# Altium PCB PCB1.PcbDoc
Units mil, origin at the board's own origin, x right, y up, seen from the top; angles counter-clockwise.
Board outline 1276.89 x 393.7 mil, 2 copper layers (Top Layer, Bottom Layer); 7 components, 9 nets, 47 pads, 10 vias.
Unrouted connection lines stored in the file: 1.
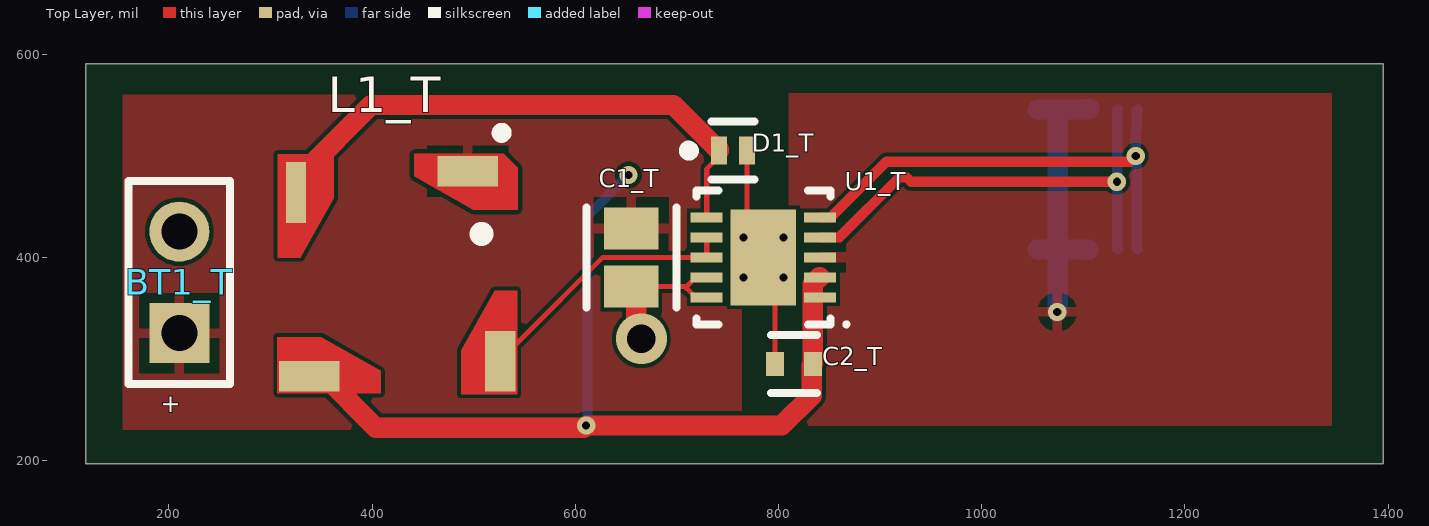
[diagram p0: Top Layer view]
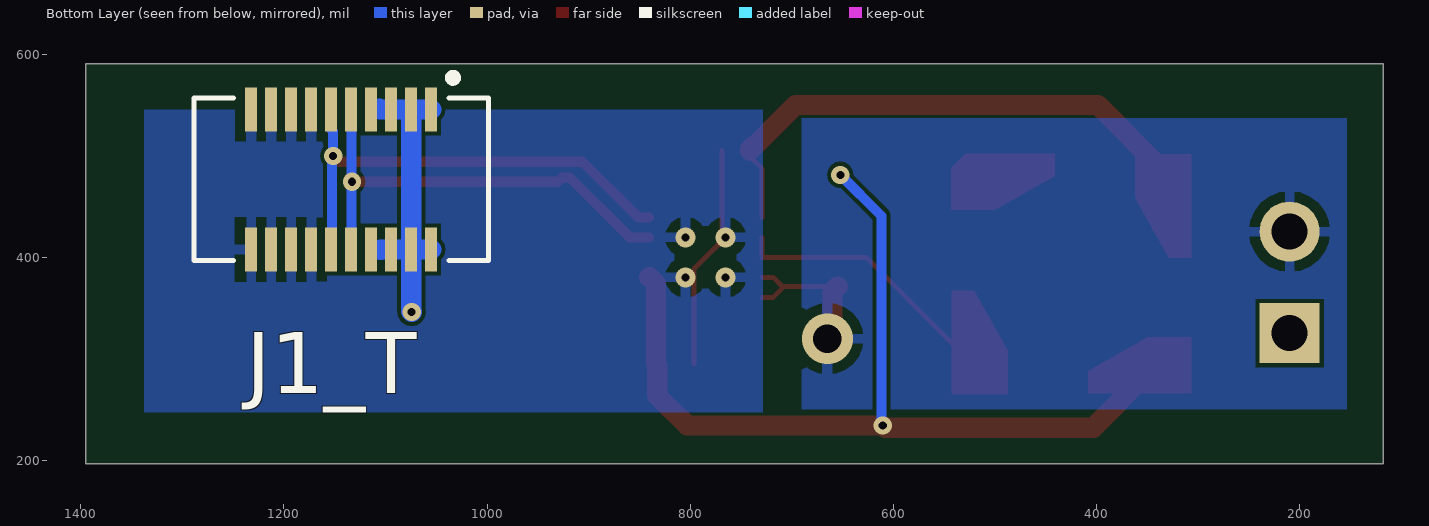
[diagram p1: Bottom Layer view, seen from below]
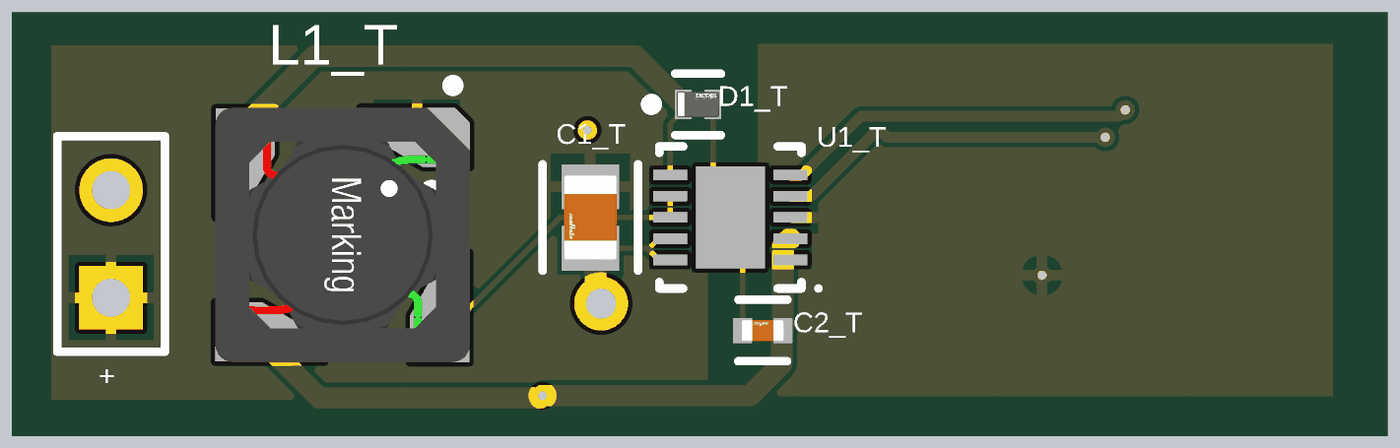
[diagram p2: 3D render of the assembled board from above, using the file's embedded part models]

## Layer stack, top to bottom
Top Solder: solder mask 0.4, Solder Resist, Dk 3.5
Top Layer: signal copper 1.4
Dielectric 1: dielectric 12.6, FR-4, Dk 4.8
Bottom Layer: signal copper 1.4
Bottom Solder: solder mask 0.4, Solder Resist, Dk 3.5

## Board outline
118.11,196.85 118.11,590.55 1395,590.55 1395,196.85

## Design rules (kind name [scope] priority, off if disabled: settings)
Clearance [All] p1: gap=4 ignorepadtopadclearanceinfootprint=FALSE
PolygonConnect [All] p1: connectstyle=Relief reliefconductorwidth=10 reliefentries=4 polygonreliefangle="90 Angle" airgapwidth=10
RoutingVias [All] p1: holewidth=8 width=18 viastyle="Through Hole" minholewidth=8 minwidth=18 maxholewidth=28 maxwidth=50
SolderMaskExpansion [All] p1: expansion=4 istentingtop=FALSE
Width [All] p1: maxlimit=50 minlimit=4 preferedwidth=10
30 further rules are at their usual default settings.

## Components (designator, comment, footprint, x,y, rotation, side; value= is the part's Value field where it differs from the comment)
BT1_T "Battery" BAT-2 210.13,375.38 r90 top
C1_T "GRM21BR60E107ME15L" FP-GRM21B-0_2-e0_2_0_7-IPC_C 655,400 r270 top
C2_T "GRM155R60J475ME87D" FP-GRM155-0_15-MFG 815,295 r180 top
D1_T "BAS70LP-7B" FP-X1-DFN1006-2-MFG 755,505 r0 top value=1pF
J1_T "53916-0208" "MOLEX-  539160208" 1143.66,466.77 r0 bottom
L1_T "74488540120" "WE-EHPI 5838" 425.08,383.78 r270 top
U1_T "MCRY12-125Q-42DIT" SON50P300X80_HS-11N 785,400 r180 top

## Footprints (in the part's own frame and the unit in brackets; to place one, negate y for a bottom-side part, rotate by r counter-clockwise, add the part's x,y. Pads: shape width x height; smd on the part's side, far side on the other; paste and mask are expansions set on the pad)
BAT-2 [mm] "Battery; 2 Leads"
  rect 1.5x1.5 hole 0.9: 1(-1.27,0)
  round 1.5 hole 0.9: 2(1.27,0)
  silkscreen extent -2.54,-1.27 2.54,1.27
FP-GRM21B-0_2-e0_2_0_7-IPC_C [mil]
  rect 41.52x53.39 smd paste+0 mask+0: 1(-28.57,0) 2(28.57,0)
  silkscreen extent -49,-44 49,44, body extent -53,-32 53,32, height 10
FP-GRM155-0_15-MFG [mm]
  rect 0.45x0.6 smd paste+0 mask+0: 1(-0.475,0) 2(0.475,0)
  silkscreen extent -0.58,-0.73 0.58,0.72, body extent -0.8,-0.43 0.8,0.43, height 0.25
FP-X1-DFN1006-2-MFG [mm]
  rect 0.4x0.7 smd paste+0 mask+0: 1(-0.35,0) 2(0.35,0)
  silkscreen extent -1.22,-0.72 0.54,0.72, body extent -0.65,-0.45 0.65,0.45, height 0.25
"MOLEX-  539160208" [mm]
  rect 0.3x1.1 smd: 1(-2.25,1.5) 2(-2.25,-2) 3(-1.75,1.5) 4(-1.75,-2) 5(-1.25,1.5) 6(-1.25,-2) 7(-0.75,1.5) 8(-0.75,-2) 9(-0.25,1.5) 10(-0.25,-2) 11(0.25,1.5) 12(0.25,-2) 13(0.75,1.5) 14(0.75,-2) 15(1.25,1.5) 16(1.25,-2) 17(1.75,1.5) 18(1.75,-2) 19(2.25,1.5) 20(2.25,-2)
  silkscreen extent -3.68,-2.89 3.68,1.78, body extent -3.65,-2.3 3.65,1.8, height 3.46
SON50P300X80_HS-11N [mm] "SON, 10-Leads, Body 3.00x3.00mm, Pitch 0.50mm, Thermal Pad 2.40x1.63mm, IPC Medium Density"
  rect 0.8x0.25 smd: 1(-1.415,1) 2(-1.415,0.5) 3(-1.415,0) 4(-1.415,-0.5) 5(-1.415,-1) 6(1.415,-1) 7(1.415,-0.5) 8(1.415,0) 9(1.415,0.5) 10(1.415,1)
  rect 1.63x2.4 smd: EP(0,0)
  silkscreen extent -2.13,-1.68 1.67,1.72, body extent -1.53,-1.52 1.52,1.53, height 0.8
"WE-EHPI 5838" [mil] "Power Inductor 4-Leads, SMD, Body 6.0 x 6.0mm"
  rect 30x60 smd: 1(-101,69) 3(101,-87)
  rect 30x60 on Top Paste: 1(-101,69) 3(101,-87)
  rect 60x30 smd: 2(86,101)
  rect 60x30 on Top Paste: 2(86,101)
  rect 60x20 smd: 4(-80,-100)
  rect 60x20 on Top Paste: 4(-80,-100)
  Top Layer region: -117.65,-62.88 -74.35,-62.88 -74.35,-118 -117.65,-118
  Top Layer region: -16.1,-95.94 -74.35,-62.88 -74.35,-118 -66,-118 -16.1,-117.94
  Top Layer region: 95.5,-16.75 62.44,-75 117.56,-75 117.56,-66.65 117.5,-16.75
  Top Layer region: 62.44,-118.31 62.44,-75 117.56,-75 117.56,-118.31
  Top Layer region: 16.75,95.5 75,62.44 75,117.56 66.65,117.56 16.75,117.5
  Top Layer region: 118.31,62.44 75,62.44 75,117.56 118.31,117.56
  Top Layer region: -96.08,16.39 -63.02,74.64 -118.14,74.64 -118.14,66.29 -118.08,16.39
  Top Layer region: -118.14,74.64 -118.11,74.66 -118.11,104.33 -104.33,118.11 -62.99,118.11 -62.99,74.66 -63.02,74.64
  silkscreen extent -144,83 -39,107, body extent -118,-118 118,118, height 157

## Part data
BT1_T: "Multicell Battery", LatestRevisionDate=17-Jul-2002, LatestRevisionNote="Re-released for DXP Platform.", PackageDescription="Battery; 2 Leads", PackageReference=BAT-2, Published=24-Mar-1999, Publisher="Altium Limited"
C1_T: library part CMP-06035-029069-1, "Chip Multilayer Ceramic Capacitors for General Purpose, 0805, 100uF, X5R, 15%, 20%, 2.5V", Capacitance=100uF, Case Code (Imperial)=0805, Case Code (Metric)=2012, Dielectric=X5R, Max Operating Temperature=85°C, Min Operating Temperature=-55°C, Tolerance=20%, Voltage Rating=2.5V, Case/Package=0805, Length=0.079inch, Mount="Surface Mount", Packaging="Tape and Reel", Thickness=0.057inch, Voltage Rating (DC)=2.5V, Width=0.049inch
C2_T: library part CMP-2008-04550-5, "Chip Multilayer Ceramic Capacitors for General Purpose, 0402, 4.7uF, X5R, 15%, 20%, 6.3V", Capacitance=4.7uF, Case Code (Imperial)=0402, Case Code (Metric)=1005, Dielectric=X5R, Max Operating Temperature=85°C, Min Operating Temperature=-55°C, Package Quantity=1, Tolerance=20%, Voltage=6.3V, Case/Package=0402, Construction=Flat, Depth=0.5mm, Height=0.5mm, Lead Free="Lead Free", Length=1mm, Mount="Surface Mount", Packaging="Tape and Reel", Radiation Hardening=No, REACH SVHC="No SVHC", Series=GRM, Thickness=0.022inch, Voltage Rating=6.3V, Voltage Rating (DC)=6.3V, Width=0.02inch
D1_T: library part CMP-12790-000002-1, "DIODE SCHTTKY 70V 70MA X1DFN1006", Capacitance=1pF, Forward Current=70mA, Manufacturer="Diodes Inc.", Max Junction Temp=+150°C, Max Repetitive Reverse Voltage=70V, Max Surge Forward Current=800mA, Package=X1-DFN1006-2, Peak Reverse Current=0.1uA, Temperature="-65°C to +150°C", Temperature Range Low=-65°C, Automotive=No, Category=Diode, ComponentLink2Description=Datasheet, ComponentLink2URL=https://www.diodes.com/assets/Datasheets/BAS70LP.pdf, Device Class L1="Discrete Semiconductors", Device Class L2=Diodes, Device Class L3="Schottky Diodes", Digikey Description="DIODE SCHTTKY 70V 70MA X1DFN1006", Footprint Url=https://www.diodes.com/assets/Package-Files/X1-DFN1006-2.pdf, Height=0.53mm, Lead Free=Yes, Manufacturer Part Number=BAS70LP-7B, Mouser Description="Schottky Diodes & Rectifiers Schottky Diode", Octopart=https://octopart.com/bas70lp-7b-diodes+inc.-22053921, Reverse Voltage=70V, RoHS=TRUE, Standoff Height=0mm, Temperature Range High=+150°C
L1_T: library part CMP-1384-00002-1, "Energy Harvesting Coupled Inductor,SMD, WE-EHPI, L=13.0 µH", Inductance="13.0 ÂµH", Manufacturer="Wuerth Elektronik", ComponentLink1Description="Manufacturer URL", ComponentLink1URL=http://www.we-online.com, ComponentLink2Description=Datasheet, ComponentLink2URL=http://katalog.we-online.de/pbs/datasheet/74488540120.pdf, PackageReference="WE-EHPI 5838", PartNumber=74488540120

## Via types
v1: diameter 18, hole 8, Top Layer to Bottom Layer, 5 vias
v2: diameter 19.68, hole 7.87, Top Layer to Bottom Layer, 4 vias
v3: diameter 50, hole 28, Top Layer to Bottom Layer, 1 vias

## Nets (pads, with @x,y where several pads share a name; then routed paths per layer and width w, separated by ;. In a path a pad name is that pad's centre, name@x,y a point inside that pad or via, vN(x,y) a via of type N, cw(c..) or ccw(c..) an arc to the next point about the centre after c; other vN are vias at no path point)
AIN0: J1_T.9 J1_T.10 U1_T.4 | length 456.8
  Top Layer w10: U1_T.4 859.68,419.69 918.46,478.46 926.34,478.46 930.35,474.45 v1(1132.91,474.45)
  Bottom Layer w10: J1_T.9 1133.37,408.17 1133.37,474 v1(1132.91,474.45) 1133.37,474.9 1133.37,545.06 J1_T.10
AIN1: J1_T.11 J1_T.12 U1_T.5 | length 475.3
  Top Layer w10: U1_T.5 851.38,439.37 906.06,494.06 1145.75,494.06 v1(1151.54,499.84)
  Bottom Layer w10: J1_T.11 1152.6,408.62 1152.6,498.78 v1(1151.54,499.84) 1151.54,523.84 1152.6,524.91 1152.6,544.61 J1_T.12
EH_VOUT: J1_T.1 J1_T.2 J1_T.3 J1_T.4 J1_T.5 J1_T.6 J1_T.7 J1_T.8 U1_T.3 | length 300.4
  Bottom Layer w20: J1_T.1 J1_T.3 ; J1_T.2 J1_T.4 ; v1(1074.29,346.34) 1074.76,346.81 J1_T.3 ; 1104.72,407.48 1104.49,407.72 J1_T.5 J1_T.3 ; 1105.98,546.38 1105.12,545.51 J1_T.6 J1_T.4 ; J1_T.3 J1_T.4
GND: C2_T.2 D1_T.2 J1_T.13 J1_T.14 J1_T.15 J1_T.16 J1_T.17 J1_T.18 J1_T.19 J1_T.20 U1_T.EP | length 221.4
  Top Layer w5: D1_T.2 768.78,416.22 U1_T.EP 796.3,388.7 C2_T.2
  other v2: 765.32,380.31 804.69,380.31 765.32,419.69 804.69,419.69
LX1: L1_T.2@526.08,297.78 U1_T.7 U1_T.8 | length 251.9
  Top Layer w5: L1_T.2@535.23,308.3 535.23,308.55 544.97,318.29 545.22,318.29 626.92,400 U1_T.8 U1_T.7
LX2: D1_T.1 L1_T.4@325.08,463.78 U1_T.6 | length 550
  Top Layer w5: U1_T.6 729.29,487.17 741.22,499.09 D1_T.1
  Top Layer w20: L1_T.4@319.04,470.14 324.65,475.75 324.65,483.5 332.4,483.5 398.9,550 696.22,550 737.44,508.78 739.09,508.78 741.22,506.65 D1_T.1
TEG_GND: BT1_T.2 C1_T.2 U1_T.9 U1_T.10 | length 177.1
  Top Layer w5: C1_T.2 709.58,371.43 ; U1_T.10 718.46,360.63 709.58,369.52 709.58,371.43 ; U1_T.9 718.46,380.31 709.58,371.43
  Top Layer w20: BT1_T.2 BT1_T.2@223.06,412.45 ; C1_T.2 660,366.43 660,325 v3(665,320)
TEG_VCC: BT1_T.1 C1_T.1 L1_T.1@494.08,484.78
VINP: C2_T.1 L1_T.3@338.08,282.78 U1_T.1 U1_T.2 | length 912.5
  Top Layer w20: L1_T.3@338.08,282.78 353.08,282.78 403.54,232.32 608.35,232.32 v1(610.59,234.57) 803.19,234.57 832.56,263.94 832.56,293.86 C2_T.1 833.7,373.98 840.04,380.31 U1_T.2
  Bottom Layer w10: v1(610.59,234.57) 611.89,235.87 611.89,440.75 v1(652.32,481.18)
pads on no net: L1_T.1@494.08,484.78 L1_T.2@526.08,297.78 L1_T.3@338.08,282.78 L1_T.4@325.08,463.78

## Polygon pours and split planes (outlines as drawn)
TEG_VCC on Top Layer "NONET_L-01_P-001" (solid, pour order 7): 154.37,230.47 763.91,230.47 763.91,560.04 154.37,560.04
EH_VOUT on Top Layer "NONET_L-01_P-001" (solid, pour order 8): 810.06,561.46 810.06,234.06 1344.49,234.06 1344.49,561.46
GND on Bottom Layer "GND_L02_P005" (solid, pour order 5): 1337.32,247.72 728.45,247.72 728.45,545.51 1337.32,545.51
TEG_GND on Bottom Layer "TEG_GND_L02_P006" (solid, pour order 6): 154.09,250.59 690.53,250.59 690.53,537.05 154.09,537.05

## Silkscreen, mask and mechanical layers (free items; w line width, h text height)
Mechanical 1:
  the board outline again, w4

## Text inside footprints (layer, text, board x,y; h text height)
BT1_T: Top Overlay "+" at 215,245 h30 r90